# Altium PCB RGBParkLightSmall.PCBDOC
Units mm, origin at the board's own origin, x right, y up, seen from the top; angles counter-clockwise.
Board outline 152.4 x 101.6 mm, 2 copper layers (Top Layer, Bottom Layer); 1 components, 23 nets, 9 pads, 0 vias.
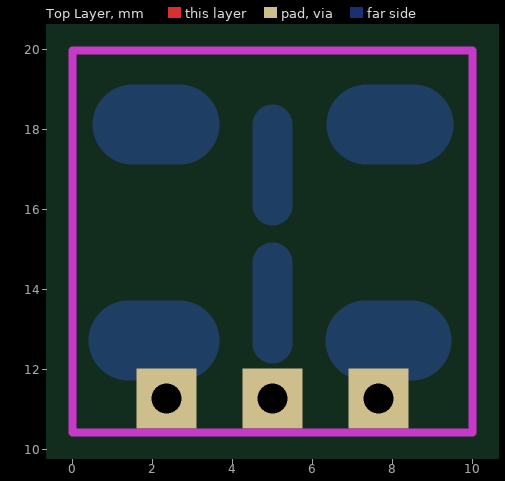
[diagram p0: Top Layer view]
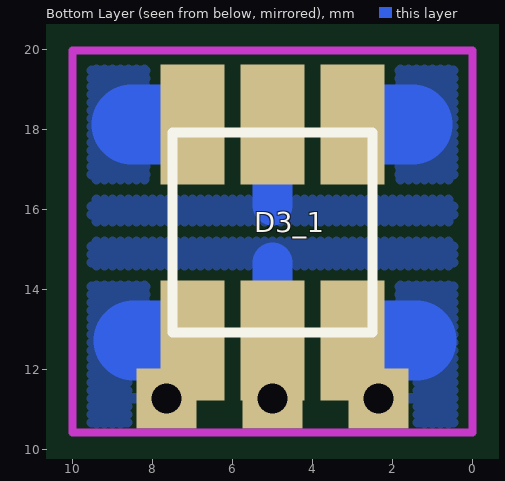
[diagram p1: Bottom Layer view, seen from below]

## Layer stack, top to bottom
Top Layer: signal copper 0.0356
Dielectric: dielectric 0.32, FR-4, Dk 4.8
Bottom Layer: signal copper 0.0356

## Board outline
-64.6,-31.55 87.8,-31.55 87.8,70.05 -64.6,70.05

## Design rules (kind name [scope] priority, off if disabled: settings)
Clearance [All] p1 off: gap=0.25
ComponentClearance [All] p1 off: gap=0 collisioncheckmode=0
PolygonConnect [All] p1: connectstyle=Relief reliefconductorwidth=0.254 reliefentries=4 polygonreliefangle="90 Angle"
RoutingLayers [All] p1: top layer=Horizontal bottom layer=Vertical
RoutingVias [All] p1: holewidth=0.711 width=1.27 viastyle="Through Hole" minholewidth=0.711 minwidth=1.27 maxholewidth=0.711 maxwidth=1.27
ShortCircuit [All] p1 off: allowed=FALSE
SolderMaskExpansion [All] p1: expansion=0.102
TestPointUsage [All] p1: valid=0 allowmultiple=FALSE
Testpoint [All] p1: side=15 testpointundercomponent=TRUE minsize=1.016 maxsize=2.54 preferedsize=1.524 minholesize=0 maxholesize=1.016 preferedholesize=0.813 testpointgrid=0.025 style=1023 order=-539222988
UnRoutedNet [All] p1 off:
Width [All] p1: maxlimit=3 minlimit=0.2 preferedwidth=0.25 toplayer_prefwidth=0.254 minimp=50.000000 maximp=50.000000 favimp=50.000000
14 further rules are at their usual default settings.

## Components (designator, comment, footprint, x,y, rotation, side; value= is the part's Value field where it differs from the comment)
D3_1 "LED RGB" AF-5060 7,12.725 r180 bottom (schematic designator D3)

## Footprints (in the part's own frame and the unit in brackets; to place one, negate y for a bottom-side part, rotate by r counter-clockwise, add the part's x,y. Pads: shape width x height; smd on the part's side, far side on the other; paste and mask are expansions set on the pad)
AF-5060 [mm] "5060 SMD Package for 20 mA RGB LED with 6 pins"
  rect 1.6x3 smd: 1(0,0) 2(2,0) 3(4,0) 4(4,5.4) 5(2,5.4) 6(0,5.4)
  silkscreen extent -0.5,0.2 4.5,5.2

## Part data
D3_1: library part LED

## Free pads (board coordinates)
  rect 1.5x1.5 hole 0.75: 0(2.35,11.275) 1(5,11.275) 2(7.65,11.275)

## Nets (pads, with @x,y where several pads share a name; then routed paths per layer and width w, separated by ;. In a path a pad name is that pad's centre, name@x,y a point inside that pad or via, vN(x,y) a via of type N, cw(c..) or ccw(c..) an arc to the next point about the centre after c; other vN are vias at no path point)
BLUE: 
D4AA: 
D4AK: 
D4BA: 
D4BK: 
D4CA: 
D4CK: 
GND: 
GREEN: 
IN1: 
IN2: 
NetD3_1: 
NetD3_2: 
NetD3_3: 
NetD5_2: 
NetD5_4: 
NetD5_5: 
NetD5_6: 
NetQ2_2: 
NetR1_2: 
POWER: 
RED: 
VCC: 
pads on no net: D3_1.1 D3_1.2 D3_1.3 D3_1.4 D3_1.5 D3_1.6
copper on no net: | length 8.8
  Bottom Layer w1: 5,12.65 5,14.675 ; 5,16.1 5,18.125
  Bottom Layer w2: 1.4,12.725 2.675,12.725 ; 1.5,18.125 2.675,18.125 ; 7.325,12.725 8.475,12.725 ; 7.35,18.125 8.525,18.125

## Polygon pours and split planes (outlines as drawn)
no net on Bottom Layer (hatched 90Degree grid 0.2 track 0.25, remove dead copper): 0.5,16.25 9.55,16.25 9.55,15.7 0.475,15.7 0.475,16.25
no net on Bottom Layer (hatched 90Degree grid 0.2 track 0.25, remove dead copper): 6.275,20.025 9.6,20.025 9.6,16.75 6.325,16.75 6.325,20.025
no net on Bottom Layer (hatched 90Degree grid 0.2 track 0.25, remove dead copper): 3.8,16.625 0.35,16.625 0.35,20.1 3.8,20.1
no net on Bottom Layer (hatched 90Degree grid 0.2 track 0.25, remove dead copper): 0.475,14.6 0.475,15.2 9.55,15.2 9.55,14.6
no net on Bottom Layer (hatched 90Degree grid 0.2 track 0.25, remove dead copper): 0.475,10.65 0.475,14.1 3.675,14.1 3.675,10.65
no net on Bottom Layer (hatched 90Degree grid 0.2 track 0.25, remove dead copper): 6.325,10.65 6.325,14.1 9.55,14.1 9.55,10.65

## Keep-outs
Keep-Out Layer:
  lines w0.2: 0,10.425 10,10.425 10,19.975 0,19.975 0,10.425